# Altium PCB cjb.PcbDoc (part 1 of 2)
Units mil, origin at the board's own origin, x right, y up, seen from the top; angles counter-clockwise.
Board outline 3345 x 2980 mil, 2 copper layers (Top Layer, Bottom Layer), stack 62.8 mil thick; 123 components, 85 nets, 398 pads, 132 vias.
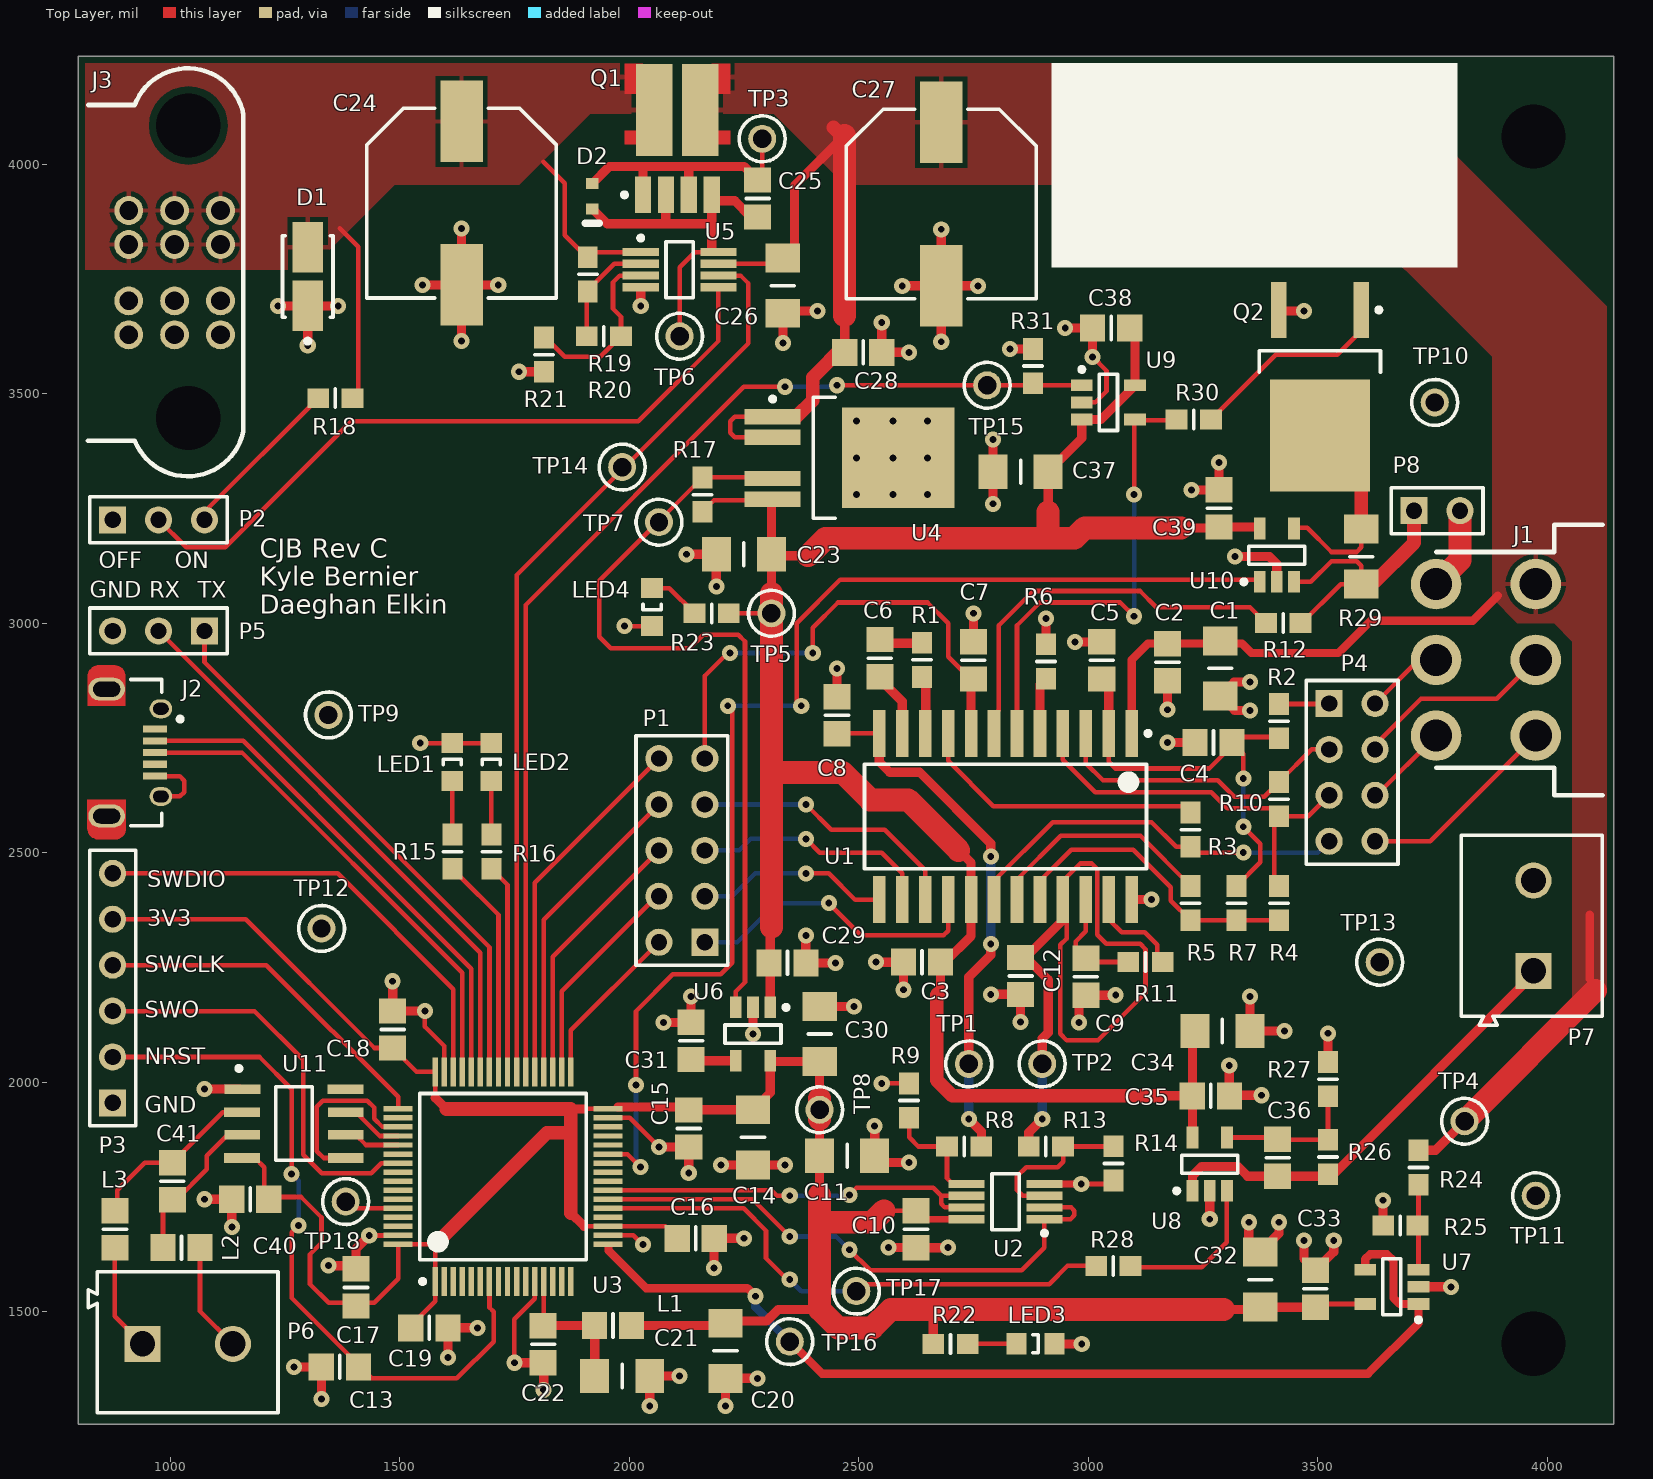
[diagram p0: Top Layer view]
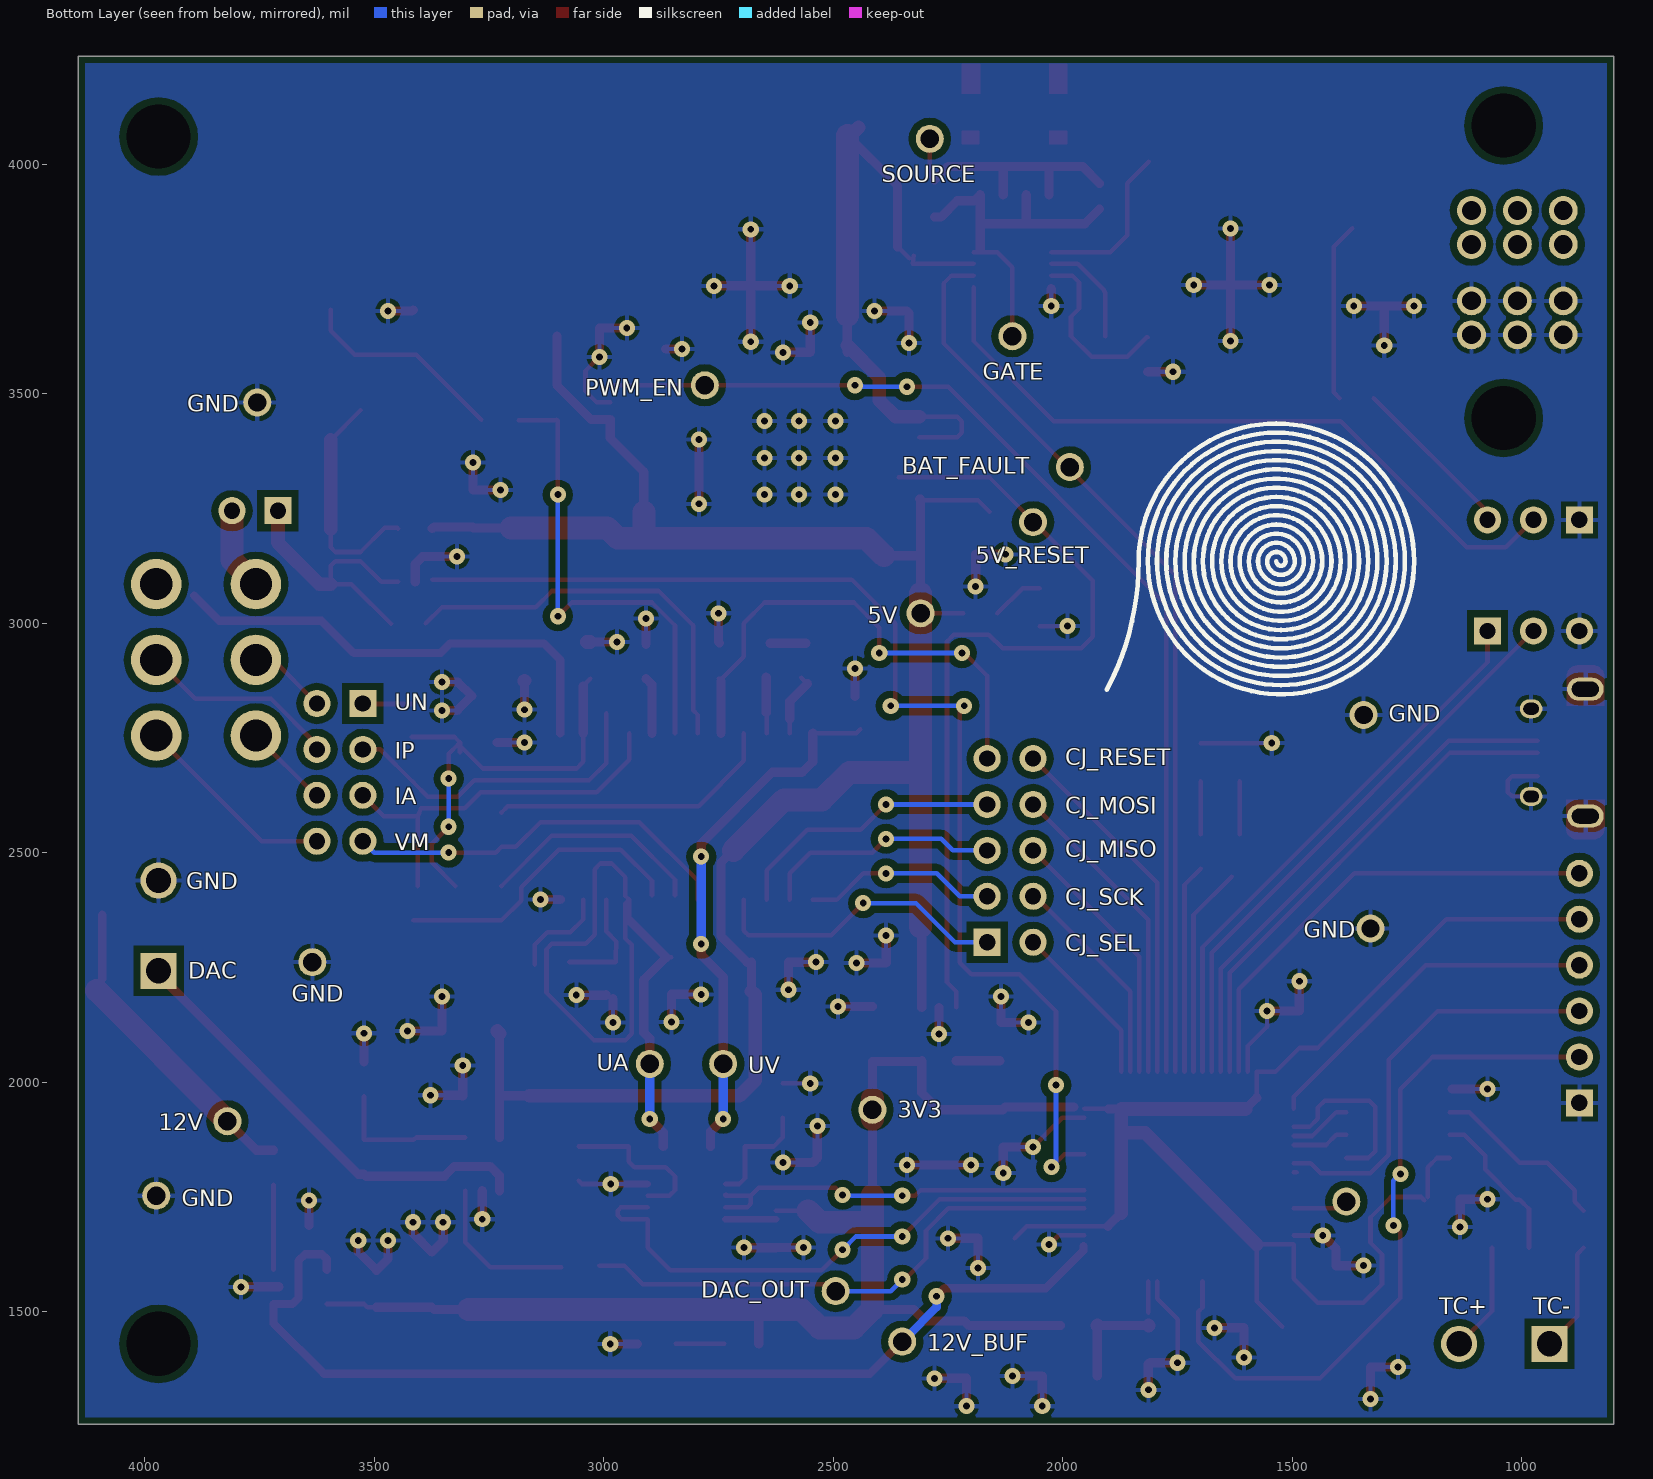
[diagram p1: Bottom Layer view, seen from below]

## Layer stack, top to bottom
Top Solder: solder mask 1, Solder Resist, Dk 3.5
Top Layer: signal copper 1.4
Dielectric 1: core 60, FR4, Dk 4.6
Bottom Layer: signal copper 1.4
Bottom Solder: solder mask 1, Solder Resist, Dk 3.5

## Board outline
800,1255 800,4235 4145,4235 4145,1255

## Design rules (kind name [scope] priority, off if disabled: settings)
BoardOutlineClearance [All] p1: gap=15 ignorepadtopadclearanceinfootprint=FALSE
Clearance [All] p1: gap=10 ignorepadtopadclearanceinfootprint=FALSE except(6: Track-Track Track-SMDPad SMDPad-SMDPad; 15: Track-Fill Track-Poly Track-Region SMDPad-Fill SMDPad-Poly SMDPad-Region THPad-Fill THPad-Poly THPad-Region Via-Fill Via-Poly Via-Region)
DiffPairsRouting [All] p1: maxlimit=10 minlimit=10 mostfreqgap=10 toplayer_minwidth=10 toplayer_maxwidth=15 toplayer_prefwidth=10 bottomlayer_minwidth=10 bottomlayer_maxwidth=15 bottomlayer_prefwidth=10 maxuncoupledlength=500
HoleSize [All] p1: absolutevalues=TRUE maxlimit=200 minlimit=10 maxpercent=80.000 minpercent=20.000
MinimumAnnularRing [All] p1: minimumring=5
MinimumSolderMaskSliver [All] p1: minsoldermaskwidth=4
PlaneConnect [All] p1: planeconnectstyle=Direct reliefexpansion=20 reliefentries=4 reliefconductorwidth=10 reliefairgap=10
PolygonConnect [All] p1: connectstyle=Relief reliefconductorwidth=10 reliefentries=4 polygonreliefangle="90 Angle" airgapwidth=10
RoutingVias [All] p1: holewidth=6 width=16 viastyle="Through Hole" minholewidth=6 minwidth=16 maxholewidth=28 maxwidth=50
SilkToSolderMaskClearance [IsPad] p1: minsilkscreentomaskgap=6 clearancetoexposedcopper=TRUE
SolderMaskExpansion [All] p1: expansion=3
Width [All] p1: maxlimit=100 minlimit=6 preferedwidth=10 minimp=40.000000 maximp=50.000000 favimp=45.000000
25 further rules are at their usual default settings.

## Classes and differential pairs
component class U_thermocouple: C40 C41 L2 L3 U11
component class U_heater: C37 C38 C39 Q2 R29 R30 R31 TP15 U9 U10
component class U_breakout: C34 C35 C36 J1 J2 J3 P3 P4 P5 P6 P7 P8 R26 R27 R28 TP9 TP10 TP11 TP12 TP13 TP17 U8
component class U_power: C23 C24 C25 C26 C27 C28 C29 C30 C31 C32 C33 D1 D2 LED3 LED4 P2 Q1 R17 R18 R19 R20 R21 R22 R23 R24 R25 TP3 TP4 TP5 TP6 TP7 TP8 TP14 TP16 U4 U5 U6 U7
component class U_microcontroller: C13 C14 C15 C16 C17 C18 C19 C20 C21 C22 L1 LED1 LED2 P1 R15 R16 TP18 U3
component class U_cj125: C1 C2 C3 C4 C5 C6 C7 C8 C9 C10 C11 C12 R1 R2 R3 R4 R5 R6 R7 R8 R9 R10 R11 R12 R13 R14 TP1 TP2 U1 U2
differential pair USB_D: +USB_D_P -USB_D_N

## Components (designator, comment, footprint, x,y, rotation, side; value= is the part's Value field where it differs from the comment)
C1 "Generic 1206 Capacitor" 1206 3287.94,2901.5 r270 top value=1u
C2 "Generic 0805 Capacitor" 0805 3172.94,2915.1 r90 top value=33n
C3 "Generic 0805 Capacitor" 0805 2637.94,2261.5 r180 top value=33n
C4 "Generic 0805 Capacitor" 0805 3272.94,2740.1 r180 top value=DNI
C5 "Generic 0805 Capacitor" 0805 3029.65,2918.9 r90 top value=2.2n
C6 "Generic 0805 Capacitor" 0805 2546.27,2923.9 r90 top value=100n
C7 "Generic 0805 Capacitor" 0805 2750,2918.9 r90 top value=1n
C8 "Generic 0805 Capacitor" 0805 2452.94,2799.61 r270 top value=100n
C9 "Generic 0805 Capacitor" 0805 2995,2230 r90 top value=100n
C10 "Generic 0805 Capacitor" 0805 2625,1680 r90 top value=100n
C11 "Generic 1206 Capacitor" 1206 2475,1840 r180 top value=1u
C12 "Generic 0805 Capacitor" 0805 2852.94,2231.5 r90 top value=100n
C13 "Generic 0805 Capacitor" 0805 1370,1380 r0 top value=100n
C14 "Generic 1206 Capacitor" 1206 2270,1880 r90 top value=1u
C15 "Generic 0805 Capacitor" 0805 2130,1899.22 r90 top value=100n
C16 "Generic 0805 Capacitor" 0805 2145,1660 r180 top value=100n
C17 "Generic 0805 Capacitor" 0805 1405,1553 r270 top value=100n
C18 "Generic 0805 Capacitor" 0805 1485,2115 r270 top value=100n
C19 "Generic 0805 Capacitor" 0805 1565,1465 r180 top value=100n
C20 "Generic 1206 Capacitor" 1206 2210,1415 r90 top value=1u
C21 "Generic 1206 Capacitor" 1206 1985,1360 r180 top value=1u
C22 "Generic 0805 Capacitor" 0805 1812.85,1429.25 r90 top value=100n
C23 "Generic 1206 Capacitor" 1206 2250,3150 r180 top value=1u
C24 "Generic Electrolytic Capacitor" NIC-UUX2A470MNL1GS_M 1635,3915 r270 top value=22u
C25 "Generic 0805 Capacitor" 0805 2280,3925 r90 top value=1n
C26 "Generic 1206 Capacitor" 1206 2335,3735 r90 top value=2.2u
C27 "Generic Electrolytic Capacitor" NIC-UUX2A470MNL1GS_M 2680,3912.99 r270 top value=22u
C28 "Generic 0805 Capacitor" 0805 2510,3590 r180 top value=100n
C29 "Generic 0805 Capacitor" 0805 2345,2260 r180 top value=100n
C30 "Generic 1206 Capacitor" 1206 2415,2105 r270 top value=2.2u
C31 "Generic 0805 Capacitor" 0805 2135,2090 r270 top value=10n
C32 "Generic 1206 Capacitor" 1206 3375,1570 r270 top value=1u
C33 "Generic 0805 Capacitor" 0805 3495,1550 r270 top value=100n
C34 "Generic 1206 Capacitor" 1206 3292.4,2111.59 r180 top value=1u
C35 "Generic 0805 Capacitor" 0805 3267.4,1970.37 r180 top value=100n
C36 "Generic 0805 Capacitor" 0805 3412.64,1835.45 r270 top value=DNI
C37 "Generic 1206 Capacitor" 1206 2852.94,3330 r0 top value=1u
C38 "Generic 0805 Capacitor" 0805 3050,3642.99 r0 top value=100n
C39 "Generic 0805 Capacitor" 0805 3285,3250 r270 top value=100n
C40 "Generic 0805 Capacitor" 0805 1175,1745 r0 top value=100n
C41 "Generic 0805 Capacitor" 0805 1005,1784.46 r270 top value=10n
D1 "SMAJ58CA" VISH-DO-214AC-2_M 1300,3755 r90 top
D2 "BZT52C15T-7" DIOD-SOD523-2_V 1920,3930 r270 top
J1 "IPBT-103-H1-XX-D-RA" IPBT-103-H1-XX-D-RA 3866.5,2920 r270 top
J2 "ZX62D-B-5PA8" HIRO-ZX62D-B-5PA8_V 921,2718 r270 top
J3 "MPT-02-01-XX-X-RA-SD" MPT-02-01-XX-X-RA-SD 1010,3762.89 r270 top
L1 "MI0805K601R-10" 0805 1965,1470 r180 top
L2 "MI0805K601R-10" 0805 1025,1639.65 r180 top
L3 "MI0805K601R-10" 0805 880,1680 r90 top
LED1 "150080SS75000" 0805_A 1615,2697.4 r270 top
LED2 "150080SS75000" 0805_A 1700,2697.4 r270 top
LED3 "150080SS75000" 0805_A 2885,1430 r180 top
LED4 "150080SS75000" 0805_A 2050,3035 r90 top
P1 "Header 5X2" HDR2X5 2165,2305 r90 top
P2 "Header 3" HDR1X3 875,3225 r0 top
P3 "Header 6" HDR1X6 875,1955 r90 top
P4 "Header 4X2" HDR2X4 3525,2825 r270 top
P5 "Header 3" HDR1X3 1075,2983.14 r180 top
P6 "SCREW-5.0/5.08 2WAYS" Degson_DG126-5.0-02P-14 940,1430 r0 top
P7 "SCREW-5.0/5.08 2WAYS" Degson_DG126-5.0-02P-14 3970,2242.5 r90 top
P8 "Header 2" HDR1X2 3710,3245 r0 top
Q1 "SQJ974EP-T1_GE3CT-ND" VISH-POWERPAKSO-8_A_V 2105,4078.14 r90 top
Q2 "NTD5865NLT4G" TO-252AA 3505,3515 r270 top
R1 "Generic 0603 Resistor" 0603 2637.94,2920.1 r270 top value="31.6k 1%"
R2 "Generic 0603 Resistor" 0603 3415.62,2786.5 r270 top value=0
R3 "Generic 0603 Resistor" 0603 3222.94,2550.1 r90 top value="301 1%"
R4 "Generic 0603 Resistor" 0603 3415.62,2390.1 r270 top value="470k 5%"
R5 "Generic 0603 Resistor" 0603 3222.94,2390.1 r90 top value="4.7k 5%"
R6 "Generic 0603 Resistor" 0603 2907.94,2916.5 r90 top value="10k 5%"
R7 "Generic 0603 Resistor" 0603 3323.36,2390.1 r270 top value="100k 5%"
R8 "Generic 0603 Resistor" 0603 2730,1860 r180 top value="187k 1%"
R9 "Generic 0603 Resistor" 0603 2610,1960 r270 top value="365k 1%"
R10 "Generic 0603 Resistor" 0603 3415.62,2616.5 r270 top value="61.9 0.1%"
R11 "Generic 0603 Resistor" 0603 3125,2261.5 r180 top value="100k 5%"
R12 "Generic 0603 Resistor" 0603 3425,3000 r180 top value="6.8k 5%"
R13 "Generic 0603 Resistor" 0603 2907.94,1860 r0 top value="187k 1%"
R14 "Generic 0603 Resistor" 0603 3055,1823.14 r90 top value="365k 1%"
R15 "Generic 0603 Resistor" 0603 1615,2502.4 r270 top value="470 5%"
R16 "Generic 0603 Resistor" 0603 1700,2502.4 r270 top value="470 5%"
R17 "Generic 0603 Resistor" 0603 2160,3280 r270 top value="100k 5%"
R18 "Generic 0603 Resistor" 0603 1360,3490 r0 top value="510k 5%"
R19 "Generic 0603 Resistor" 0603 1910,3760 r270 top value="6.34M 1%"
R20 "Generic 0603 Resistor" 0603 1945,3625 r0 top value="95.3k 1%"
R21 "Generic 0603 Resistor" 0603 1815,3585 r270 top value="205k 1%"
R22 "Generic 0603 Resistor" 0603 2700,1430 r180 top value="470 5%"
R23 "Generic 0603 Resistor" 0603 2180,3021.5 r0 top value="470 5%"
R24 "Generic 0603 Resistor" 0603 3719.57,1814.29 r270 top value="768k 1%"
R25 "Generic 0603 Resistor" 0603 3680,1687.8 r0 top value="187k 1%"
R26 "Generic 0603 Resistor" 0603 3522.4,1837.13 r270 top value=187k
R27 "Generic 0603 Resistor" 0603 3522.4,2006.59 r270 top value=365k
R28 "Generic 0603 Resistor" 0603 3055,1600 r0 top value=150k
R29 "Generic 1206 Resistor" 1206 3595,3145 r270 top value="7m 1% 1W"
R30 "Generic 0603 Resistor" 0603 3230,3443.39 r0 top value="4.7k 5%"
R31 "Generic 0603 Resistor" 0603 2880,3560 r270 top value="100k 5%"
TP1 "5001" KSTN-5001 2740,2040 r0 top
TP2 "5001" KSTN-5001 2899.94,2040 r0 top
TP3 "5001" KSTN-5001 2290,4055 r90 top
TP4 "5001" KSTN-5001 3820,1915 r90 top
TP5 "5001" KSTN-5001 2310,3021.5 r0 top
TP6 "5001" KSTN-5001 2110,3625 r90 top
TP7 "5001" KSTN-5001 2065,3220 r90 top
TP8 "5001" KSTN-5001 2415,1940 r0 top
TP9 "5001" KSTN-5001 1345,2800 r0 top
TP10 "5001" KSTN-5001 3755,3480.79 r90 top
TP11 "5001" KSTN-5001 3975,1752.8 r90 top
TP12 "5001" KSTN-5001 1330,2335 r90 top
TP13 "5001" KSTN-5001 3635,2261.5 r90 top
TP14 "5001" KSTN-5001 1985,3340 r90 top
TP15 "5001" KSTN-5001 2780,3518.19 r90 top
TP16 "5001" KSTN-5001 2350,1435 r90 top
TP17 "5001" KSTN-5001 2495,1545 r90 top
TP18 "5001" KSTN-5001 1382.65,1740 r90 top
U1 "CJ125" SOIC-24 2820,2578.9 r270 top
U2 "MCP6L02T-E/MS" MSOP8_M 2820,1740 r180 top
U3 "STM32L475RCT3" STM-LQFP64_L 1725.36,1794.3 r90 top
U4 "TLS850D0TEV50ATMA1" KVU0005A_M 2480,3360 r0 top
U5 "LTC4367HMS" MSOP8_M 2110,3770 r0 top
U6 "TPS79933QDDCRQ1" DDC0005A_M 2270,2105 r270 top
U7 "MCP6L01T-E/OT" DDC0005A_M 3661.5,1554.32 r180 top
U8 "MCP6L01T-E/OT" DDC0005A_M 3264.8,1821.59 r90 top
U9 "UCC27519DBVT" DDC0005A_M 3044.14,3480.79 r0 top
U10 "INA180A2IDBVT" DDC0005A_M 3411,3148 r90 top
U11 "MAX31855KASA+" SOIC8 1270,1910 r0 top

## Footprints (in the part's own frame and the unit in brackets; to place one, negate y for a bottom-side part, rotate by r counter-clockwise, add the part's x,y. Pads: shape width x height; smd on the part's side, far side on the other; paste and mask are expansions set on the pad)
0603 [mm] "0603 - Based on VIshey Recommendations"
  rect 1.2x1.1 smd mask+0.1: 1(-0.95,0) 2(0.95,0)
  silkscreen extent 0,-0.51 0,0.51, body extent -0.8,-0.4 0.8,0.4, height 0.76
0805 [mm] "0805 - Based on VIshey Recommendations"
  rect 1.4x1.5 smd mask+0.1: 1(-1.025,0) 2(1.025,0)
  silkscreen extent 0,-0.64 0,0.64, body extent -1,-0.63 1,0.63, height 1.02
0805_A [mm] "Chip LED, 2-Leads, Body 2.0x1.3mm, IPC Medium Density"
  rect 1.1x1.2 smd: 1(-1.05,0) 2(1.05,0)
  silkscreen extent -0.15,-0.5 0.15,0.5, body extent -1,-0.62 1,0.63, height 0.68
1206 [mm] "1206 - Based on VIshey Recommendations"
  rect 1.6x1.9 smd mask+0.1: 1(-1.524,0) 2(1.524,0)
  silkscreen extent 0,-0.64 0,0.64, body extent -1.6,-0.79 1.6,0.79, height 1.6
DDC0005A_M [mm] "SOT23, 5-Leads, Body 3.05x1.75mm, Pitch 0.95mm, IPC Low Density"
  rect 1.2x0.65 smd mask+0.076: 1(-1.475,0.95) 2(-1.475,0) 3(-1.475,-0.95) 4(1.475,-0.95) 5(1.475,0.95)
  silkscreen extent -1.6,-1.55 0.5,1.95, body extent -1.5,-1.52 1.5,1.52, height 1.45
Degson_DG126-5.0-02P-14 [mm]
  rect 2x2 hole 1.4 mask+0.102: 1(0,0)
  round 2 hole 1.4 mask+0.102: 2(5,0)
  silkscreen extent -3,-3.8 7.5,4
DIOD-SOD523-2_V [mm] "SOD523, 2-Leads, Body 1.2x0.8mm"
  rect 0.6x0.7 smd: 1(-0.7,0) 2(0.7,0)
  silkscreen extent 1.5,-0.4 1.5,0.4, body extent -0.8,-0.4 0.8,0.4, height 0.65
HDR1X2 [mm] "Connector; Header; 2 Position"
  rect 1.5x1.5 hole 0.9: 1(0,0)
  round 1.5 hole 0.9: 2(2.54,0)
  silkscreen extent -1.27,-1.27 3.81,1.27
HDR1X3 [mm] "Connector; Header; 3 Position"
  rect 1.5x1.5 hole 0.9: 1(0,0)
  round 1.5 hole 0.9: 2(2.54,0) 3(5.08,0)
  silkscreen extent -1.27,-1.27 6.35,1.27
HDR1X6 [mm] "Connector; Header; 6 Position"
  rect 1.5x1.5 hole 0.9: 1(0,0)
  round 1.5 hole 0.9: 2(2.54,0) 3(5.08,0) 4(7.62,0) 5(10.16,0) 6(12.7,0)
  silkscreen extent -1.27,-1.27 13.97,1.27
HDR2X4 [mm] "Connector; Header; 4x2 Position"
  rect 1.5x1.5 hole 0.9: 1(0,0)
  round 1.5 hole 0.9: 2(0,2.54) 3(2.54,0) 4(2.54,2.54) 5(5.08,0) 6(5.08,2.54) 7(7.62,0) 8(7.62,2.54)
  silkscreen extent -1.27,-1.27 8.89,3.81
HDR2X5 [mm] "Connector; Header; 5x2 Position"
  rect 1.5x1.5 hole 0.9: 1(0,0)
  round 1.5 hole 0.9: 2(0,2.54) 3(2.54,0) 4(2.54,2.54) 5(5.08,0) 6(5.08,2.54) 7(7.62,0) 8(7.62,2.54) 9(10.16,0) 10(10.16,2.54)
  silkscreen extent -1.27,-1.27 11.43,3.81
HIRO-ZX62D-B-5PA8_V [mm] "SMD, 5-Leads, Body 7.5x5mm, Pitch 0.65mm"
  rect 0.4x1.35 smd mask+0.051: 1(-1.3,1.175) 2(-0.65,1.175) 3(0,1.175) 4(0.65,1.175) 5(1.3,1.175)
  oval 1.05x1.25 hole 0.65 slot 0.85 at 90 deg mask+0.076: 6(-2.425,1.5) 7(2.425,1.5)
  oval 1.27x2.032 hole 0.825 slot 1.5 at 90 deg: 8(-3.512,-1.5) 9(3.512,-1.5)
  Top Layer region: 4.2,-2.45 4.391,-2.412 4.554,-2.304 4.662,-2.141 4.7,-1.95 4.7,-1.95 4.7,-1.05 4.662,-0.859 4.554,-0.696 4.391,-0.588 4.2,-0.55 4.2,-0.55 2.6,-0.55 2.6,-2.45
  Top Layer region: -4.2,-2.45 -4.391,-2.412 -4.554,-2.304 -4.662,-2.141 -4.7,-1.95 -4.7,-1.95 -4.7,-1.05 -4.662,-0.859 -4.554,-0.696 -4.391,-0.588 -4.2,-0.55 -4.2,-0.55 -2.6,-0.55 -2.6,-2.45
  Top Layer region: -4.2,-2.54 -4.492,-2.478 -4.718,-2.285 -4.826,-2.007 -4.826,-2.007 -4.826,-1.016 -4.724,-0.729 -4.497,-0.526 -4.2,-0.457 -4.2,-0.457 -2.6,-0.457 -2.6,-2.54
  Top Layer region: 4.2,-2.565 4.487,-2.489 4.704,-2.287 4.801,-2.007 4.801,-2.007 4.801,-0.991 4.706,-0.709 4.488,-0.506 4.2,-0.432 4.2,-0.432 2.6,-0.432 2.6,-2.565
  silkscreen extent -4.05,-0.15 4.05,2.69, body extent -4.05,-4.25 4.05,1.55, height 2.75
IPBT-103-H1-XX-D-RA [mil]
  round 110 hole 70 mask+3: 1(-165,108.5) 2(0,108.5) 3(165,108.5) 4(-165,-108.5) 5(0,-108.5) 6(165,-108.5)
  silkscreen extent -294,-109 295,254, body extent -274,-131 274,574, height 439
KSTN-5001 [mm] "Test Point, Through Hole, Dia 2.54mm"
  round 1.55 hole 1.016: 1(0,0)
  silkscreen extent -1.27,-1.27 1.27,1.27, body extent -1.24,-1.24 1.25,1.25, height 4.62
KVU0005A_M [mm] "DPAK, 5-Leads, Body 6.22x6.7mm, Pitch 1.14mm, IPC Low Density"
  rect 3.1x0.85 smd mask+0.076: 1(-4.25,2.28) 2(-4.25,1.14) 4(-4.25,-1.14) 5(-4.25,-2.28)
  rect 6.2x5.55 smd mask+0.076: 6(2.7,0)
  silkscreen extent -4.37,-3.35 -0.8,3.38, body extent -4.77,-3.25 5.13,3.25, height 2.32
MPT-02-01-XX-X-RA-SD [mm]
  round 1.6 hole 1.04 mask+0.075: 1(-3.458,2.54) 2(-3.458,0) 3(-3.458,-2.54) 4(-1.578,2.54) 5(-1.578,0) 6(-1.578,-2.54) 7(1.542,2.54) 8(1.542,0) 9(1.542,-2.54) 10(3.423,2.54) 11(3.423,0) 12(3.423,-2.54)
  round 0 hole 3.56 unplated: 25(-8.157,0.76) 26(8.026,0.76)
  silkscreen extent -11.32,-4.79 11.25,3.8, body extent -10.73,-11.49 10.63,3.32, height 10.93
MSOP8_M [mm] "TSOP, 8-Leads, Body 3x3mm, Pitch 0.65mm, IPC Low Density"
  rect 2x0.45 smd mask+0.046: 1(-2.15,0.975) 2(-2.15,0.325) 3(-2.15,-0.325) 4(-2.15,-0.975) 5(2.15,-0.975) 6(2.15,-0.325) 7(2.15,0.325) 8(2.15,0.975)
  silkscreen extent -2.27,-1.55 0.75,1.87, body extent -1.55,-1.55 1.55,1.55, height 1.1
NIC-UUX2A470MNL1GS_M [mm] "Aluminum Electrolytic Capacitor, Body 10.5x10.5mm, IPC Low Density"
  rect 4.5x2.35 smd mask+0.076: 1(-4.525,0) 2(4.525,0)
  silkscreen extent -5.25,-5.25 5.25,5.25, body extent -5.65,-5.25 5.65,5.25, height 10.8
SOIC8 [mm] "Based on MAX31855"
  rect 1.98x0.53 smd mask+0.046: 1(-2.845,1.905) 2(-2.87,0.635) 3(-2.861,-0.625) 4(-2.87,-1.905) 5(2.87,-1.905) 6(2.861,-0.625) 7(2.87,0.635) 8(2.845,1.905)
  silkscreen extent -3.17,-2.03 1.02,3.17, body extent -3.01,-2.45 3.01,2.45, height 1.63
SOIC-24 [mm] "SOIC, 24-Leads, Body 15.4x7.5mm, Pitch 1.27mm, IPC Low Density"
  rect 2.6x0.7 smd mask+0.076: 1(-4.6,6.985) 2(-4.6,5.715) 3(-4.6,4.445) 4(-4.6,3.175) 5(-4.6,1.905) 6(-4.6,0.635) 7(-4.6,-0.635) 8(-4.6,-1.905) 9(-4.6,-3.175) 10(-4.6,-4.445) 11(-4.6,-5.715) 12(-4.6,-6.985) 13(4.6,-6.985) 14(4.6,-5.715) 15(4.6,-4.445) 16(4.6,-3.175) 17(4.6,-1.905) 18(4.6,-0.635) 19(4.6,0.635) 20(4.6,1.905) 21(4.6,3.175) 22(4.6,4.445) 23(4.6,5.715) 24(4.6,6.985)
  silkscreen extent -4.72,-7.8 2.9,8.01, body extent -5.26,-7.72 5.26,7.72, height 1.7
STM-LQFP64_L [mm] "QFP, 64-Leads, Body 10x10mm, Pitch 0.5mm, IPC High Density"
  rect 1.6x0.3 smd mask+0.038: 1(-5.8,3.75) 2(-5.8,3.25) 3(-5.8,2.75) 4(-5.8,2.25) 5(-5.8,1.75) 6(-5.8,1.25) 7(-5.8,0.75) 8(-5.8,0.25) 9(-5.8,-0.25) 10(-5.8,-0.75) 11(-5.8,-1.25) 12(-5.8,-1.75) 13(-5.8,-2.25) 14(-5.8,-2.75) 15(-5.8,-3.25) 16(-5.8,-3.75) 33(5.8,-3.75) 34(5.8,-3.25) 35(5.8,-2.75) 36(5.8,-2.25) 37(5.8,-1.75) 38(5.8,-1.25) 39(5.8,-0.75) 40(5.8,-0.25) 41(5.8,0.25) 42(5.8,0.75) 43(5.8,1.25) 44(5.8,1.75) 45(5.8,2.25) 46(5.8,2.75) 47(5.8,3.25) 48(5.8,3.75)
  rect 0.3x1.6 smd mask+0.038: 17(-3.75,-5.8) 18(-3.25,-5.8) 19(-2.75,-5.8) 20(-2.25,-5.8) 21(-1.75,-5.8) 22(-1.25,-5.8) 23(-0.75,-5.8) 24(-0.25,-5.8) 25(0.25,-5.8) 26(0.75,-5.8) 27(1.25,-5.8) 28(1.75,-5.8) 29(2.25,-5.8) 30(2.75,-5.8) 31(3.25,-5.8) 32(3.75,-5.8) 49(3.75,5.8) 50(3.25,5.8) 51(2.75,5.8) 52(2.25,5.8) 53(1.75,5.8) 54(1.25,5.8) 55(0.75,5.8) 56(0.25,5.8) 57(-0.25,5.8) 58(-0.75,5.8) 59(-1.25,5.8) 60(-1.75,5.8) 61(-2.25,5.8) 62(-2.75,5.8) 63(-3.25,5.8) 64(-3.75,5.8)
  silkscreen extent -5.92,-4.6 4.6,4.6, body extent -6,-6 6,6, height 1.6
TO-252AA [mm] "TO-252AA based on IRLR2908"
  rect 3.1x0.85 smd mask+0.076: 1(-4.25,2.28) 3(-4.25,-2.28)
  rect 6.2x5.55 smd mask+0.076: 4(2.7,0)
  silkscreen extent -4.37,-3.35 -0.8,3.38, body extent -4.77,-3.25 5.13,3.25, height 2.32
VISH-DO-214AC-2_M [mm] "DO-214AC, 2-Leads, Body 4.5x2.79mm, IPC Low Density"
  rect 2.8x1.7 smd mask+0.076: 1(-1.625,0) 2(1.625,0)
  silkscreen extent -3.7,-1.4 2.25,1.4, body extent -2.25,-1.39 2.25,1.4, height 2.29
VISH-POWERPAKSO-8_A_V [mil] "SMD, 8-Leads, Body 6.15x5.155mm, Pitch 1.27mm"
  rect 80x35 smd mask+3: 1(-145,75) 2(-145,25) 3(-145,-25) 4(-145,-75)
  rect 200x80 smd mask+3: 5(40,-50) 6(40,50)
  Top Layer region: -35,-115 -5,-115 -5,-77.5 -35,-77.5
  Top Layer region: -35,75 -5,75 -5,115 -35,115
  Top Layer region: 75,75 140,75 140,115 75,115
  Top Layer region: 75,-115 140,-115 140,-75 75,-75
  silkscreen extent -150,110 -140,120, body extent -141,-100 101,101, height 46

## Part data
C1 C11 C14 C20 C21 C23 C26 C30 C32 C34 C37: library part C_1206
C2 C3 C4 C5 C6 C7 C8 C9 C10 C12 C13 C15 C16 C17 C18 C19 C22 C25 C28 C29 C31 C33 C35 C36 C38 C39 C40 C41: library part C_0805
C24 C27: library part C_can, "Generic PCAP_10x10 Can Aluminum Electrolytic Capacitor", Voltage=200V
D1: "Transient Voltage Suppressor, 6.40 to 231 V, 58 V Stand-off Voltage, Bi-Directional, -55 to 155 degC, 2-pin DO-214AC, Pb-Free, Tape and Reel", Manufacturer="Vishay Semiconductor", Operating Junction and Storage Temperature Range="-55 to 150 degC", PartNumber=SMAJ58CA-E3/5A, Supplier Part Number 1=SMAJ58CALFCT-ND, ComponentLink1Description="Manufacturer URL", ComponentLink1URL=http://www.vishay.com/, ComponentLink2Description=Datasheet, ComponentLink2URL=http://www.vishay.com/docs/88390/smaj50a.pdf, ComponentLink3Description="Package Specification", ComponentLink3URL=http://www.vishay.com/docs/88390/smaj50a.pdf, DatasheetVersion=12/8/2013, ID (uA)=2, IFSM="40 A", Mounting Technology="Surface Mount", PackageDescription="2-Pin DO-214AC (SMA), Body 4.245 x 2.665 mm", PackageReference=DO-214AC-2, Packing="Tape and Reel", PPPM (W)="400, 300", RoHS=TRUE, Supplier 1=Digi-Key, VBR Bi-Directional (V)="6.4 to 231", VWM (V)=58
D2: library part BZT52C15T, "Zener Diode 15V 300mW ±6% Surface Mount SOD-523", Manufacturer="Diodes Inc", Maximum Reverse Current="0.1 uA", Operating Temperature="-65 to 150 degC", PartNumber=BZT52C16-7-F, Power Max="500 mW", Voltage Zener="16 V Typ.", ComponentLink1Description="Manufacturer URL", ComponentLink1URL=http://www.diodes.com/, ComponentLink2Description=Datasheet, ComponentLink2URL=http://www.diodes.com/datasheets/ds18004.pdf, ComponentLink3Description="Package Specification", ComponentLink3URL=http://www.diodes.com/datasheets/ap02002.pdf, DatasheetVersion="Rev. 37-2", Maximum Zener Impedance f="1 kHz ZZK=200 Ohm", Mounting Technology="Surface Mount", PackageDescription="2-Pin SOD123, Body 2.7 x 1.55 mm, Height 1.45 mm", PackageReference=SOD123, PackageVersion="Rev. 79", Packing="Tape and Reel", RoHS=TRUE, Tol V="5.56% Typ."
J1: "0.165 INCH DOUBLE ROW TERMINAL ASSEMBLY", ComponentLink1Description="Manufacturer URL", ComponentLink1URL=http://www.linear.com/, ComponentLink2Description=Datasheet, ComponentLink2URL=http://cds.linear.com/docs/en/datasheet/4356fa.pdf, ComponentLink3Description="Package Specification", ComponentLink3URL=http://cds.linear.com/docs/en/packaging/05081661_F_MS.pdf
J2: library part Micro_USB, "Micro-USB Connector Meeting USB 2.0 Standard, -30 to 85 degC, 5-Pin SMD, RoHS, Tape and Reel", Color=Black, Current Rating=1A, Manufacturer=HiroseElectric, Operating Temperature Range=-30Cto+85C, Package Description="5-Pin Surface Mount Device, Body 7.5 x 5 mm, Pitch 0.65 mm", Voltage Rating=30V, Brand=HiroseConnector, Connector Type=Receptacle, Contact Material=CopperAlloy, Contact Plating=Gold, Datasheet URL=https://datasheet.ciiva.com/22825/0900766b8118f7b1-22825836.pdf, Datasheet Version=08/2010, Factory Pack Quantity=2000, Gender=Male, Manufacturer URL=https://www.hirose.com, Mounting Angle=Right, Mounting Technology=SurfaceMount, Number of Contacts=5Contact, Number of Ports=1Port, Package Reference=ZX62D-B-5PA8, Packaging=Reel, Product=MicroUSBTypeBConnectors, Product Category=USBConnectors, RoHS=Details, Series=ZX, Shell Plating=Tin, Standard=USB2.0, Termination Style=Solder
L1 L2 L3: library part MI0805K, "Chip Bead for Power Filtering, 1500 mA, 600 Ohm, -40 to 125 degC, 0805 (2012 Metric), RoHS, Tape and Reel", Current Rating (Max)=1.5A, DC Resistance (DCR) (Max)=100mOhm, Impedance @ Frequency=600Ohm@100MHz, Manufacturer=Laird, Operating Temperature=-40degC~125degC, Package / Case=0805(2012Metric), Package Description="2-Pin Surface Mount Device, Body 2 x 1.25 mm", Package Reference=MI0805K601R-10-2, Ratings=-, Standard Package=1, Catalog Drawings=(HI,HZ,LI,MI)0805Series_1.10mmMax.Height, Category=Filters, Datasheet URL=https://datasheet.ciiva.com/3082/mi0805k601r-10-a-vp-3082219.pdf, Datasheet Version="Rev. A, 01/2004", Family=FerriteBeadsandChips, Filter Type=PowerLine, Height (Max)="0.043\"(1.10mm)", Kits=240-2227-ND-KITEMIFERRITEBEADCHIPSMD, Manufacturer URL=https://www.lairdtech.com, Mounting Type=SurfaceMount, Number of Lines=1, Online Catalog=MISeries, Other Names=240-2390-1, Packaging=CutTape(CT), Series=MI, Size / Dimension="0.079\"Lx0.049\"W(2.00mmx1.25mm)"
LED1 LED2 LED3 LED4: library part LED_0805, "SMD mono-color Chip LED, WL-SMCW, Super Red", Color="Super Red", Manufacturer="Wuerth Elektronik", ComponentLink1Description="Manufacturer URL", ComponentLink1URL=http://www.we-online.com, ComponentLink2Description=Datasheet, ComponentLink2URL=http://katalog.we-online.com/led/datasheet/150080SS75000.pdf, PackageReference=0805_A, PartNumber=150080SS75000
P1: "Header, 5-Pin, Dual row", LatestRevisionDate=17-Jul-2002, LatestRevisionNote="Re-released for DXP Platform.", Publisher="Altium Limited"
P2 P5: "Header, 3-Pin", LatestRevisionDate=17-Jul-2002, LatestRevisionNote="Re-released for DXP Platform.", Publisher="Altium Limited"
P3: "Header, 6-Pin", LatestRevisionDate=17-Jul-2002, LatestRevisionNote="Re-released for DXP Platform.", Publisher="Altium Limited"
P4: "Header, 4-Pin, Dual row", LatestRevisionDate=17-Jul-2002, LatestRevisionNote="Re-released for DXP Platform.", Publisher="Altium Limited"
P6 P7: library part Screw_Header_2, "Socket, Screw Terminal Block, 2 Way, 5.0 mm Pitch, 90 Degree Angle, Through-Hole", Contact Resistance="20 mOhm", Insulation Resistance="5000 MOhm / 1000 V", Manufacturer="No Vendor", Rated Current="25 A", Rated Voltage="300 V", Temperature Range="-40 to 105 degC", ComponentLink1Description=Datasheet, ComponentLink1URL="5mm screw terminal in SVN", Mounting Technology="Through Hole", PackageDescription="Socket, Screw Terminal Block, 2 Way, Pitch 5 mm, 90 Degree Angle, Through-Hole", PartNumber="SCREW-5.0/5.08 2WAYS", Poles=2
P8: "Header, 2-Pin", LatestRevisionDate=17-Jul-2002, LatestRevisionNote="Re-released for DXP Platform.", Publisher="Altium Limited"
Q1: library part SQJ974EP, "Mosfet Array 2 N-Channel (Dual) 100V 30A (Tc) 48W Surface Mount PowerPAK® SO-8 Dual", Current - Continuous Drain (Id) @ 25°C=20A, Drain to Source Voltage (Vdss)=40V, Input Capacitance (Ciss) @ Vds=565pF@20V, Manufacturer=Vishay, Package / Case=PowerPAK®SO-8Dual, Package Description="8-Pin Surface Mount Device, Body 6.15 x 5.155 mm, Pitch 1.27 mm", Package Reference=POWERPAKSO-8, Power - Max=15.6W, Standard Package=1, Category=DiscreteSemiconductorProducts, Datasheet URL=http://www.vishay.com/docs/65366/si7288dp.pdf, Datasheet Version="Rev. A, 10/2009", Family=FETs-Arrays, FET Feature=Standard, FET Type=2N-Channel(Dual), Gate Charge (Qg) @ Vgs=15nC@10V, Manufacturer URL=http://www.vishay.com/, Mounting Technology=SurfaceMount, Mounting Type=SurfaceMount, Online Catalog=N-ChannelStandardFETs, Other Names=SI7288DP-T1-GE3DKR, Packaging=Digi-Reel®, PCN Assembly/Origin=MultipleFabracationChanges09/Jul/2014, Rds On (Max) @ Id, Vgs=19mOhm@10A,10V, Series=TrenchFET®, Supplier Device Package=PowerPAK®SO-8Dual, Vgs(th) (Max) @ Id=2.8V@250µA
Q2: library part NTD5865NL, "N-Channel 60V 46A (Tc) 71W (Tc) Surface Mount DPAK"
R1 R2 R3 R4 R5 R6 R7 R8 R9 R10 R11 R12 R13 R14 R15 R16 R17 R18 R19 R20 R21 R22 R23 R24 R25 R26 R27 R28 R30 R31: library part R_0603
R29: library part R_1206
TP1 TP2 TP3 TP4 TP5 TP6 TP7 TP8 TP9 TP10 TP11 TP12 TP13 TP14 TP15 TP16 TP17 TP18: library part TP5001, "Test Point, Black, 1-Pin THD, RoHS, Bulk", Alternate Color="5004K-ND / -TESTPOINTPCMINI.040\"DYELLOW / 5003K-ND / -TESTPOINTPCMINI.040\"DORANGE / 5002K-ND / -TESTPOINTPCMINI.040\"DWHITE / 5000K-ND / -TESTPOINTPCMINI.040\"DRED", Color=Black, Manufacturer=Keystone, Standard Package=100, Catalog Drawings=5000Series, Category=TestandMeasurement, Datasheet URL=https://ciiva.com/datasheet-click-2917627?src=ciiva&sig=bd195616, Datasheet Version="Rev. G, 12/2008", Family=TestPoints, Kits="DKTGRS232C-KIT-ND / -TTLCONVERTER", Manufacturer URL=http://www.keyelco.com/, Material=Base,Nylon46,UL94V-0, Mounting Type="0.040\"(1.02mm)HoleDiameter", Online Catalog=ColorCodedTestPoints, Other Names=5001K, Packaging=Bulk, RoHS Information=RoHSComplianceStatement, Series=THM, Terminal="0.010\"x0.020\"(0.25mmx0.51mm)PhosphorBronzeWire,SilverPlated", Type=PCTestPoint,Miniature
U1: "5V 2Mbaud SMT Lambda Probe Interface IC - SOIC-24", Package Reference=SOIC-24, Supplier Part Number 1=0272240104, Supplier 1="Future Electronics"
U2: library part MCP6L02, "1 MHz, 85 μA Dual Op Amp, 8-Pin MSOP, Extended Temperature Range, Tape and Reel", ComponentLink1Description="Manufacturer URL", ComponentLink1URL=http://www.microchip.com/, ComponentLink2Description=Datasheet, ComponentLink2URL=http://ww1.microchip.com/downloads/en/DeviceDoc/22140b.pdf, ComponentLink3Description="Package Specification", ComponentLink3URL=http://www.microchip.com/stellent/groups/techpub_sg/documents/packagingspec/en012702.pdf, DatasheetVersion="revB, Sep-2011", PackageDescription="8-Lead Plastic Micro Small Outline Package (MS) [MSOP]", PackageReference=MSOP-MS8, PackageVersion="revBB, Aug-2009", RevisionNote="URLs added. DatasheetVersion updated."
U3: "Ultra-Low-Power ARM Cortex-M4 32-bit MCU+FPU, 256 KB Flash, 128 KB Internal RAM, 51 I/Os, 64-Pin LQFP, -40 to 125 degC, Tray", I/Os (High Current)=51, Operating Frequency(F) (Processor speed) (MHz)=80, Package=LQFP64, Package Description="64-Pin Low-profile Quad Flat Package, Body 10 x 10 mm, Pitch 0.5 mm", Supplier Part Number 1=497-16840-ND, Supply Voltage(Vcc) min (V)=1.71, ComponentLink1Description=Datasheet, ComponentLink1URL=http://www.st.com/content/ccc/resource/technical/document/datasheet/90/51/73/d2/53/60/4f/5f/DM00172872.pdf/files/DM00172872.pdf/jcr:content/translations/en.DM00172872.pdf, Core="ARM Cortex-M4", D/A Converter=2, DatasheetVersion="Rev. 4", FLASH Size (Prog) (kB)=256, Internal RAM Size (kB)=128, Mounting Technology="Surface Mount", Packing=Tray, Supplier 1=Digi-Key
U4: library part TLS850D0TE, "Linear Voltage Regulator IC  1 Output  500mA PG-TO252-5", Manufacturer="Texas Instruments", PartNumber=TPS7A6150QKVURQ1, Supplier Part Number 1=296-36856-6-ND, Accuracy(%)=2, Code_JEDEC=TO-252, ComponentLink1Description="Manufacturer URL", ComponentLink1URL=http://www.ti.com/, ComponentLink2Description=Datasheet, ComponentLink2URL=http://www.ti.com/general/docs/lit/getliterature.tsp?genericPartNumber=TPS7A6150-Q1&fileType=pdf, ComponentLink3Description="Package Specification", ComponentLink3URL=http://www.ti.com/lit/ml/mpsf019/mpsf019.pdf, DatasheetVersion=SLVSA62G, Eco-Plan="Green (RoHS & no Sb/Br)", Fixed Output Options(V)=5, Iout(Max)(A)=0.3, Iq(Typ)(mA)=0.02, Mounting Technology="Surface Mount", PackageDescription="5-Pin Plastic Flange Mount, Body 6.1 x 6.6 mm, Pitch 1.14 mm", PackageReference=KVU0005A, PackageVersion=4205521-3/D, SubFamily="Single Channel LDO", Supplier 1=Digi-Key, Vdo(Typ)(mV)=300, Vin(Max)(V)=40, Vin(Min)(V)=4, Vout Adj(Max)(V)=5, Vout Adj(Min)(V)=5
U5: library part LTC4367, "100V Overvoltage, Undervoltage and Reverse Supply Protection Controller", ComponentLink1Description="Manufacturer URL", ComponentLink1URL=http://www.linear.com/, ComponentLink2Description=Datasheet, ComponentLink2URL=http://cds.linear.com/docs/en/datasheet/4356fa.pdf, ComponentLink3Description="Package Specification", ComponentLink3URL=http://cds.linear.com/docs/en/packaging/05081661_F_MS.pdf
U6: library part TPS79933, "Single Output High PSRR LDO, 200 mA, Fixed 3.3 V Output, 2.7 to 6.5 V Input, with Low IQ, 5-pin SOT (DDC), -40 to 125 degC, Green (RoHS & no Sb/Br)", Manufacturer="Texas Instruments", Rating=Automotive, Accuracy(%)=2, Code_JEDEC=MO-193, ComponentLink1Description="Manufacturer URL", ComponentLink1URL=http://www.ti.com/, ComponentLink2Description=Datasheet, ComponentLink2URL=http://www.ti.com/general/docs/lit/getliterature.tsp?genericPartNumber=TPS79933-Q1&fileType=pdf, ComponentLink3Description="Package Specification", ComponentLink3URL=http://www.ti.com/litv/pdf/mpds123d, ComponentLink4Description="URL Link1", ComponentLink4URL="Samples URL:http://www.ti.com/product/tps79933-q1#samples", DatasheetVersion=SBVS097E, Eco-Plan="Green (RoHS & no Sb/Br)", Fixed Output Options(V)=3.3, Iout(Max)(A)=0.2, Iq(Typ)(mA)=0.04, Mounting Technology="Surface Mount", PackageDescription="5-Pin Plastic Small Outline, Body 2.9 x 1.6 mm, 0.95 mm Pitch", PackageReference=DDC0005A, PackageVersion=4204403-2/E, PartNumber=TPS79933QDDCRQ1, SubFamily="Single Channel LDO", Vdo(Typ)(mV)=90, Vin(Max)(V)=6.5, Vin(Min)(V)=2.7, Vout Adj(Max)(V)=3.3, Vout Adj(Min)(V)=3.3
U7 U8: library part MCP6L01, "1 MHz, 85 uA Op Amp, 5-Pin SOT-23, Extended Temperature Range", Code_IPC=SOT23-5, ComponentLink1Description="Manufacturer URL", ComponentLink1URL=http://www.microchip.com/, ComponentLink2Description=Datasheet, ComponentLink2URL=http://ww1.microchip.com/downloads/en/DeviceDoc/22140b.pdf, ComponentLink3Description="Package Specification", ComponentLink3URL=http://www.microchip.com/stellent/groups/techpub_sg/documents/packagingspec/en012702.pdf, DatasheetVersion="revB, Sep-2011", PackageDescription="5-Lead Plastic Small Outline Transistor (OT) [SOT-23]", PackageReference=SOT-23-OT5, PackageVersion="revBB, Aug-2009", RevisionNote="URLs added. DatasheetVersion updated."
U9: library part UCC27519, "Low-Side Gate Driver IC Non-Inverting SOT-23-5"
U10: library part INA180A2, "Current Sense Amplifier 1 Circuit Rail-to-Rail SOT-23-5"
U11: library part MAX31855, "Cold-Junction Compensated / Thermocouple-to-Digital Converter", ComponentLink1Description="Manufacturer URL", ComponentLink1URL=http://www.linear.com/, ComponentLink2Description=Datasheet, ComponentLink2URL=http://cds.linear.com/docs/en/datasheet/4356fa.pdf, ComponentLink3Description="Package Specification", ComponentLink3URL=http://cds.linear.com/docs/en/packaging/05081661_F_MS.pdf
J3: ComponentLink1Description="Manufacturer URL", ComponentLink1URL=http://www.linear.com/, ComponentLink2Description=Datasheet, ComponentLink2URL=http://cds.linear.com/docs/en/datasheet/4356fa.pdf, ComponentLink3Description="Package Specification", ComponentLink3URL=http://cds.linear.com/docs/en/packaging/05081661_F_MS.pdf

## Free pads (board coordinates)
  round 0 hole 140.16 unplated: ""(3970,1430) ""(3970,4060)

## Via types
v1: diameter 35, hole 15, Top Layer to Bottom Layer, tented both sides, 112 vias
v2: diameter 35, hole 15, Top Layer to Bottom Layer, 20 vias

## Nets (pads, with @x,y where several pads share a name; then routed paths per layer and width w, separated by ;. In a path a pad name is that pad's centre, name@x,y a point inside that pad or via, vN(x,y) a via of type N, cw(c..) or ccw(c..) an arc to the next point about the centre after c; other vN are vias at no path point)
3V3: C10.2 C11.2 C14.2 C15.2 C16.2 C17.2 C18.2 C19.2 C20.2 C30.2 C32.2 C33.2 C40.2 L1.1 P3.5 R22.2 TP8.1 U2.8 U3.1 U3.19 U3.32 U3.48 U3.64 U6.5 U7.5 U11.4 | length 6392.3
  Top Layer w10: P3.5 1165,2355 1445.35,2074.65 C18.2 1537,2022.65 U3.48 1577.72,1966.28 ; U11.4 1185,1835 1205.35,1814.65 C40.2@1205.35,1750 ; C40.2@1212.68,1742.68 1220,1750 1285.35,1750 1330,1705.35 1330,1650 1305,1625 1305,1560 1345.35,1519.65 1405,1519.65 1444.65,1519.65 1497.01,1572.01 U3.64 1577.72,1646.67 1577.72,1522.72 C19.2@1522.32,1467.32 ; 1901,1941.94 U3.32 ; 1902,1686.04 U3.19 2078.61,1686.04 C16.2 ; 2555,1720 2624.65,1720 C10.2 ; C32.2@3370,1505 C32.2 C32.2@3375.35,1509.65 ; C33.2 3515,1509.65 3522.28,1516.92 U7.5
  Top Layer w15: C10.2@2625,1701.61 U2.8
  Top Layer w20: 1577.72,1966.28 1602.06,1941.94 ; 1872.99,1715.04 1902,1686.04 ; 1872.99,1941.94 1901,1941.94 ; U3.32@1975.7,1945.88 C15.2@2125.5,1945.88 ; L1.1 2205,1470 C20.2 2215,1480 2300,1480 2325,1505 2415,1505 ; C15.2@2130.42,1940 C14.2 2307.4,1977.4 U6.5 2309.33,2045 C30.2 TP8.1@2415,1964.65 ; 2415,1754.65 C11.2 TP8.1@2415,1920 ; R22.2 2662.6,1502.6 2665,1505 ; 3295,1505 C32.2@3370,1505 ; C32.2@3375.35,1509.65 C33.2
  Top Layer w30: 1577.72,1646.67 1821.05,1890 1872.99,1890 ; 1602.06,1941.94 1872.99,1941.94 1872.99,1890 ; 1872.99,1715.04 1872.99,1890
  Top Layer w50: 2415,1754.65 2415,1695 ; TP8.1@2415,1920 TP8.1 TP8.1@2415,1964.65 ; 2555,1720 2530,1695 2415,1695 ; 2665,1505 3295,1505 ; 2775,1505 2570,1505 2530,1465 2455,1465 2415,1505 2415,1695
5V: C3.1 C23.1 C29.2 C34.2 C35.2 C37.2 C38.2 C39.2 R17.2 R23.2 TP5.1 U1.17 U4.5 U6.1 U8.5 U9.3 U9.5 U10.5 | length 4820.2
  Top Layer w10: R17.2 2184.96,3267.56 U4.5@2310,3267.56 ; R23.2 2308.5,3021.5 TP5.1@2310,3020 ; C39.2@3285,3207.6 C39.2
  Top Layer w20: U6.1 2307.4,2335 ; 2310,3065 C23.1 ; U4.5@2310,3270.24 U4.5@2310,3267.56 ; U4.5 U4.5@2310,3267.56 ; 2390,3147 2313,3147 C23.1 ; 2678.29,2198.29 C3.1 ; C3.1@2687.94,2261.5 2745,2318.56 2745,2478.04 2717.94,2505.1 ; 2912.94,3242.6 C37.2 2986.07,3403.13 U9.3 3027.41,3443.39 U9.5 C38.2@3102.21,3624.85 ; 3162.4,1970.37 C35.2 ; 3202.6,3207.6 C39.2@3285,3207.6 ; C34.2@3227.05,2106.23 C35.2 ; U8.5 3227.05,1880.01 C35.2 ; C39.2 3370.02,3209.65 U10.5 ; C23.1 U4.5@2310,3267.56
  Top Layer w30: 2678.29,2198.29 2670,2190 2670,2005 2704.63,1970.37 3162.4,1970.37 ; C34.2@3227.05,2106.23 C34.2
  Top Layer w50: 2310,2337.6 2310,2675 ; 2310,3065 TP5.1 2310,3020 2310,2675 ; 2390,3147 2428,3185 2912.94,3185 ; 2717.94,2505.1 2608.04,2615 2525,2615 2465,2675 2310,2675 ; 2912.94,3242.6 2912.94,3185 ; 3202.6,3207.6 2992.6,3207.6 2970,3185 2912.94,3185
5V_RESET: R17.1 TP7.1 U4.4 U6.3 | length 1789.9
  Top Layer w10: U6.3 2232.6,2197.6 2252.5,2217.5 2252.5,2960.1 2237.6,2975 2161.46,2975 2131.46,2945 1960,2945 1935,2970 1935,3092.4 R17.1 U4.4@2357.6,3317.4
12V: C1.1 C2.2 C26.2 C27.1 C28.2 J1.1 Q1.5 R24.1 TP4.1 U1.1 U4.1 U4.2 U5.7 | length 3145.9
  Top Layer w10: U5.7 2327.44,3782.8 2325.92,3793.74 C26.2@2325,3800.35 ; U4.2 2230.12,3404.88 2220,3415 2220,3440 2229.76,3449.76 U4.1 ; C26.2 C26.2@2360,3820
  Top Layer w18: U1.1@3095.15,2759.85 U1.1 3095,2920.45 3130,2955.46 C2.2 3287.94,2955.46 3335,2955.46 3355.46,2935 3545,2935 3615,3005 3837.5,3005 3892.5,3060 ; 4092.5,2224.62 4092.5,2365
  Top Layer w20: C26.2@2360,3820 2360,3952.5 2469.65,4062.15 ; C28.2 2469.65,3604.65 2469.65,3669.65 ; R24.1 3756.7,1851.7 TP4.1
  Top Layer w30: U4.1 2364.76,3449.76 2400,3485 2400,3535 C28.2@2469.65,3604.65 ; 2445,4080 2465,4060
  Top Layer w50: 2469.65,3669.65 2469.65,4062.15 ; TP4.1 4105,2200
12V_BUF: TP16.1 U3.17 U7.1 U7.4 | length 2233.8
  Top Layer w18: U3.17@1955.03,1643.02 1955.03,1632.91 2036.71,1551.23 2257.5,1551.23 v2(2275,1533.73) ; TP16.1 2420,1365 3610,1365 3719.57,1474.57 U7.1 3678.08,1516.92 3665,1530 3665,1611.23 3651.23,1625 3613.77,1625 3603.43,1614.66 U7.4
  Bottom Layer w18: v2(2275,1533.73) 2275,1510 2340,1445 TP16.1@2365,1445
BAT_FAULT: TP14.1 U3.39 U5.6 | length 1999.1
  Top Layer w10: U3.39 1754.88,3104.88 2260,3610 2260,3740 2242.8,3757.2 U5.6
CF: C9.2 R11.2 U1.22 | length 246
  Top Layer w10: U1.22 2995,2328.56 2972.94,2306.5 2974.26,2271.9 2974.65,2261.85 R11.2@3075.54,2261.85
CJ125_IA: P4.5 R4.1 R10.2 U1.4 | length 863.7
  Top Layer w10: U1.4 2945,2702.17 3015.67,2631.5 3267.94,2631.5 3302.94,2596.5 3398.22,2596.5 R10.2@3405.62,2579.09 ; R4.1@3405.62,2427.51 R10.2@3405.62,2579.09 ; P4.5 3479.09,2579.09 R10.2 R10.2@3405.62,2579.09
CJ125_IP: P4.3 R10.1 U1.3 | length 712.4
  Top Layer w10: U1.3@2995,2803.9 U1.3 2995,2694.76 3032.27,2657.5 3281.94,2657.5 3317.94,2621.5 3383.22,2621.5 R10.1 3486.72,2725 P4.3
CJ125_SPI_MISO: P1.5 U1.14 | length 528.6
  Top Layer w10: v1(2385.35,2530) 2415.35,2500 2550,2500 2595,2455 U1.14
  Bottom Layer w10: P1.5 2240,2505 2265,2530 v1(2385.35,2530)
CJ125_SPI_MOSI: P1.7 U1.15 | length 620.8
  Top Layer w10: v1(2385.35,2605) 2440.35,2550 2556.5,2550 2645,2461.5 U1.15
  Bottom Layer w10: P1.7@2152.5,2617.5 P1.7 v1(2385.35,2605)
CJ125_SPI_SCK: P1.3 U1.13 | length 424.4
  Top Layer w10: v1(2385.35,2455) 2435,2455 2492.2,2397.8 U1.13
  Bottom Layer w10: P1.3 2225,2405 2275,2455 v1(2385.35,2455)
CJ125_SPI_SEL: P1.1 U1.16 | length 666.1
  Top Layer w10: v1(2435,2390) 2505,2320 2685,2320 2695,2330 U1.16
  Bottom Layer w10: P1.1 2235,2305 2320,2390 v1(2435,2390)
CJ125_UA: U2.1 U2.2 U3.22 | length 1244.9
  Top Layer w10: U3.22 1996.2,1745.09 2268.78,1745.09 v2(2350,1663.87) ; v2(2480,1635) 2525,1590 2855,1590 2904.65,1639.65 U2.1 2961.61,1701.61 2970,1710 2970,1720 2962.8,1727.2 U2.2
  Bottom Layer w10: v2(2350,1663.87) 2451.13,1663.87 v2(2480,1635)
CJ125_UN: P4.1 R2.1 | length 109.8
  Top Layer w10: R2.1 3523.9,2823.9 P4.1
CJ125_UR: U2.6 U2.7 U3.23 | length 881.7
  Top Layer w10: U3.23 1996.17,1764.78 ; 1996.2,1764.75 2310.25,1764.75 2322.2,1752.8 v2(2350,1752.8) ; v2(2480,1754.65) 2495.35,1770 2662.8,1770 2680,1752.8 ; U2.7 2687.8,1727.2 2680,1735 2680,1752.8 ; U2.6@2735.35,1754.65 2733.5,1754.65 U2.6 2680,1752.8
  Bottom Layer w10: v2(2350,1752.8) 2478.15,1752.8 v2(2480,1754.65)
CJ125_VM: P4.7 R3.1 U1.18 | length 861.7
  Top Layer w10: U1.18 2795,2438.56 2922.94,2566.5 3137.94,2566.5 3191.73,2512.7 R3.1 3235.64,2500 v1(3337.94,2500)
  Bottom Layer w10: v1(3337.94,2500) 3500,2500 P4.7
CJ_RESET: C7.1 P1.9 U1.8 | length 1103.2
  Top Layer w10: P1.9 2165,2885 2215,2935 v2(2220,2935) ; v2(2400,2935) 2400,2990 2455,3045 2650,3045 2695,3000 2695,2926.5 2742.95,2878.54 C7.1 C7.1@2745,2873.54
  Top Layer w20: U1.8 C7.1@2745,2873.54
  Bottom Layer w10: v2(2220,2935) v2(2400,2935) v2@2395,2930
CM: C6.1 U1.11 | length 143.1
  Top Layer w10: C6.1@2556.47,2867.96 C6.1@2570,2881.5 ; U1.11 U1.11@2595,2791.5
  Top Layer w20: C6.1@2556.47,2867.96 2595,2829.43 U1.11@2595,2791.5
DAC_OUT2: R28.1 TP17.1 U3.21 | length 1189
  Top Layer w10: U3.21 2249.59,1725.41 2298.19,1676.81 2298.19,1616.81 2345,1570 v2(2350,1570) ; TP17.1 2510,1560 2915,1560 2955,1600 R28.1@3010,1600
  Bottom Layer w10: v2(2350,1570) 2375,1545 TP17.1
GND: C1.2 C2.1 C3.2 C4.2 C5.2 C7.2 C8.1 C9.1 C10.1 C11.1 C12.1 C13.1 C14.1 C15.1 C16.1 C17.1 C18.1 C19.1 C20.1 C21.1 C22.1 C23.2 C24.2 C26.1 C27.2 C28.1 C29.1 C30.1 C31.1 C32.1 C33.1 C34.1 C35.1 C37.1 C38.1 C39.1 C40.1 D1.1 J2.5 J2.6 J2.7 J2.8 J2.9 J3.7 J3.8 J3.9 J3.10 J3.11 J3.12 LED1.1 LED2.1 LED3.1 LED4.1 P2.1 P3.1 P5.3 P7.2 Q2.3 R6.2 R9.1 R14.1 R21.2 R25.1 R27.1 R31.1 TP9.1 TP10.1 TP11.1 TP12.1 TP13.1 U1.24 U2.4 U3.12 U3.18 U3.31 U3.47 U3.63 U4.6 U5.4 U6.2 U7.2 U8.2 U9.2 U10.2 U11.1 | length 7501.7
  Top Layer w10: J2.5@966.26,2666.96 1021.04,2666.96 1031,2657 1031,2632 1021.53,2622.53 J2.7 ; v1(1433.92,1666.12) 1496.78,1666.12 U3.63 ; v1(1545,2738.74) LED1.1 LED2.1 ; v1(1555,2155) 1555,2121.27 1597.4,2078.87 U3.47 ; v1(1750,1388.87) 1750,1483.87 1794.25,1528.12 U3.12 ; U3.18 2008.87,1666.35 v1@2029.28,1645.94 ; U3.31 2001.78,1922.26 v1(2065,1859.03) ; v1(1990,2993.66) LED4.1 ; v1(2550.35,1997.4) R9.1 ; C10.1 C10.1 ; v1(2985,1778.39) 3047.65,1778.39 R14.1 ; U9.2 3015.79,3480.79 3040,3505 3040,3549.65 v1(3009.65,3580)
  Top Layer w15: U2.4 v1(2985,1778.39)
  Top Layer w20: v1(1075,1745.09) 1075.09,1745 C40.1@1129.65,1745 ; v1(1075,1985) U11.1@1152,1985 ; v1(1134.65,1685) 1134.65,1740 C40.1@1129.65,1745 ; C40.1 C40.1@1129.65,1745 ; v1(1235,3691.02) D1.1 ; v1(1270,1380) C13.1 v1(1329.65,1310) ; v1(1300,3605) D1.1 ; v1(1345,1600.35) 1405,1600.35 1405,1637.2 v1(1433.92,1666.12) ; v1(1366.34,3691.02) D1.1 ; v1(1485,2220) C18.1 1485.35,2155 v1(1555,2155) ; v1(1550,3736.85) C24.2 ; v1(1605.35,1400) C19.1 v1(1670,1465) ; v1(1635,3615) C24.2 ; v1(1635,3860) C24.2 ; v1(1715,3736.85) C24.2 ; v1(1750,1388.87) 1810.81,1388.87 1813.94,1385.74 v1(1813.94,1330) ; v1(1760,3547.6) R21.2 ; v1(2025.35,3691.02) U5.4@2025.35,3728.35 ; v1(2045,1295) C21.1 v1(2110,1360) ; v1@2074.02,1858.87 C15.1 v1(2130,1801.88) ; v1(2075,2130) 2134.65,2130 C31.1 v1(2135,2186.59) ; v1(2125,3150) C23.2 v1(2190,3080) ; v1(2185,1595) 2185,1659.65 C16.1 v1(2250,1660) ; v1(2200,1820) C14.1 v1(2340,1820) ; v1(2210,1295) C20.1 v1(2280,1355) ; v1(2270,2105) U6.2 ; v1(2335,3610) C26.1 2340,3680 v1(2410,3680) ; v1(2385,2320) 2385,2260.35 C29.1 v1(2450,2260) ; C30.1 v1(2490,2165) ; C8.1 v1(2452.94,2901.5) ; v1(2535,1905) C11.1 2535,1834.33 2544.33,1825 v1(2610,1825) ; v1(2537.94,2261.5) C3.2 2597.94,2261.14 v1(2597.94,2201.5) ; v1(2550.35,3655) C28.1 v1(2610,3590) ; v1(2565,1639.6) v1(2565,1639.6) C10.1 ; v1(2595,3734.84) C27.2 ; C10.1 v1(2695,1639.6) ; v1(2680,3612.99) C27.2 ; v1(2680,3857.99) C27.2 ; C7.2@2747.85,2957.1 C7.2 v1(2750,3021.5) ; v1(2760,3734.84) C27.2 ; v1(2787.94,2191.5) 2852.58,2191.5 C12.1 v1(2852.94,2131.5) ; v1(2792.94,3260) C37.1 v1(2792.94,3400) ; v1(2830,3597.4) R31.1@2865,3597.4 ; R6.2 v1(2907.94,3010) ; LED3.1 v1(2986.07,1430) ; v1(2950,3642.99) C38.1 v1(3009.65,3580) ; v1(2971.73,2959.25) C5.2 ; v1(2980,2130) C9.1@2980,2181.67 ; C9.1@2995,2191.14 2996.5,2189.65 v1(3060,2189.65) ; U1.24 v1(3137.94,2397.8) ; v1(3172.94,2740) 3173.04,2740.1 C4.2 ; v1(3172.94,2811.5) C2.1 ; v1(3225,3290.35) C39.1 v1(3285,3350) ; v1(3264.8,1701.59) U8.2 ; v1(3307.4,2036.59) 3307.4,1970.72 C35.1 3308.97,1971.59 v1(3377.4,1971.59) ; v1(3320,3145) 3395,3145 3411,3129 U10.2 ; v1(3350,1695) 3350,1655 C32.1 3415.62,1670.62 v1(3415.62,1695) ; v1(3352.4,2186.59) C34.1 v1(3427.4,2111.59) ; v1(3352.94,2810) 3319.43,2810 C1.2 3317.94,2871.5 v1(3352.94,2871.5) ; Q2.3 3417.56,3680 v1(3470,3680) ; v1(3470,1655) 3470,1615.35 C33.1 3535,1630.35 v1(3535,1655) ; R27.1 v1(3522.4,2106.59) ; R25.1 v1(3642.6,1742.8) ; U7.2@3707.5,1554.32 U7.2 v1(3790,1554.32)
  Top Layer w30: C5.2 C5.2@3037.09,2959.25 ; C2.1 C2.1@3173.58,2874.1
  other v1: 2030,1646.67 2495,3280 2575,3280 2650,3280 2495,3360 2575,3360 2650,3360 2495,3440 2575,3440 2650,3440
HEATER-: P8.1 R12.1 R29.2 U10.3 | length 598.7
  Top Layer w10: U10.3 3484.93,3089.93 3530,3135 3585,3135 3595,3125 R29.2 3550,3085 R12.1@3463.7,2998.7
  Top Layer w30: R29.2 3620,3085 3710,3175 P8.1
NetC4_1: C4.1 C5.1 R2.2 R7.1 U1.2 | length 976.7
  Top Layer w10: C5.1 C5.1@3045,2863.19 ; U1.2 3045,2697.76 3059.27,2683.5 3263.5,2683.5 C4.1@3313.29,2733.29 ; C4.1@3313.29,2719.29 C4.1@3313.29,2733.29 ; R7.1 3375,2479.14 3375,2519.43 v2(3337.94,2556.5) ; v2(3337.94,2661.5) 3337.94,2715.46 C4.1@3316.7,2736.7 ; R2.2@3417.94,2752.03 3325.22,2752.03 C4.1 ; C4.1@3313.29,2733.29 C4.1 ; C4.1@3313.29,2733.29 C4.1@3316.7,2736.7 ; C4.1 C4.1@3316.7,2736.7
  Top Layer w20: U1.2 C5.1@3045,2863.19
  Bottom Layer w10: v2(3337.94,2556.5) v2(3337.94,2661.5)
NetC6_2: C6.2 R1.1 | length 78.3
  Top Layer w20: C6.2@2559.68,2956.3 R1.1@2637.94,2956.3
NetC25_1: C25.1 D2.2 Q1.2 Q1.4 TP6.1 U5.8 | length 813.3
  Top Layer w10: TP6.1 2110,3775 2143.39,3808.39 U5.8
  Top Layer w20: D2.2 1952.44,3870 2180,3870 ; 2080,3880 Q1.2 ; U5.8@2180,3815 2180,3870 ; C25.1 2265.35,3884.65 2230,3920 2193.14,3920 Q1.4 2180,3870
NetC25_2: C25.2 D2.1 Q1.1 Q1.3 TP3.1 | length 585.3
  Top Layer w10: C25.2 2290,3975.35 TP3.1
  Top Layer w20: D2.1 1957.44,3995 2250.35,3995 C25.2 ; Q1.1 2030,3985 ; Q1.3 2130,3985
NetC31_2: C31.2 U6.4 | length 94.9
  Top Layer w20: C31.2@2137.72,2046.93 U6.4
NetC36_1: C36.1 R26.1 R27.2 U8.4 | length 317
  Top Layer w10: U8.4 3408.79,1879.66 C36.1 3413.92,1874.53 R26.1 R27.2
NetC36_2: C36.2 P7.1 R26.2 U8.1 | length 990.1
  Top Layer w10: R26.2@3517.78,1795.1 R26.2 ; P7.1@3970,2235 P7.1@3970,2250
  Top Layer w20: U8.1 3227.4,1796.59 3247.4,1816.59 3325.92,1816.59 3347.4,1795.1 C36.2 R26.2@3517.78,1795.1 ; R26.2 3534.73,1799.73 P7.1@3970,2235
NetC41_1: C41.1 L3.2 U11.2 | length 395
  Top Layer w10: L3.2@865.94,1720.35 885,1739.41 885,1765 944.82,1824.82 C41.1 1115.18,1935 U11.2
NetC41_2: C41.2 L2.2 U11.3 | length 341.3
  Top Layer w10: L2.2 984.65,1723.75 C41.2 1014.01,1744.11 1080,1810.1 1080,1840 1125.39,1885.39 U11.3
NetJ1_2: J1.2 P4.4 | length 436.6
  Top Layer w10: P4.4 3625,2735 3725,2835 3890,2835 J1.2
NetJ1_3: J1.3 P4.8 | length 431.1
  Top Layer w10: P4.8 3745,2525 J1.3@3965,2745
NetJ1_4: J1.4 P8.2 | length 181.5
  Top Layer w50: J1.4 3810,3137 P8.2
NetJ1_5: J1.5 P4.2 | length 172.4
  Top Layer w10: P4.2 3720,2920 J1.5
NetJ1_6: J1.6 P4.6 | length 186.8
  Top Layer w10: P4.6 3628,2625 J1.6
NetLED1_2: LED1.2 R15.1 | length 116.3
  Top Layer w10: R15.1 LED1.2
NetLED2_2: LED2.2 R16.1 | length 116.3
  Top Layer w10: R16.1 LED2.2
NetLED3_2: LED3.2 R22.1 | length 106.3
  Top Layer w10: R22.1 LED3.2
NetLED4_2: LED4.2 R23.1 | length 115.3
  Top Layer w10: LED4.2 2087.76,3076.34 R23.1
NetP1_2: P1.2 U3.33 | length 368.9
  Top Layer w10: U3.33 1872.99,2112.99 2057.8,2297.8 P1.2@2075,2297.8
NetP1_4: P1.4 U3.34 | length 480
  Top Layer w10: U3.34 1853.31,2198.31 2052.8,2397.8 P1.4@2075,2397.8
NetP1_6: P1.6 U3.35 | length 585.2
  Top Layer w10: U3.35 1833.62,2273.62 2057.8,2497.8 P1.6@2075,2497.8
NetP1_8: P1.8 U3.36 | length 693.4
  Top Layer w10: U3.36 1813.94,2353.94 2057.8,2597.8 P1.8@2075,2597.8
NetP1_10: P1.10 U3.37 | length 794.5
  Top Layer w10: U3.37 1794.25,2434.25 P1.10
NetP2_2: P2.2 U5.5 | length 1547.7
  Top Layer w10: P2.2 1035,3165 1120,3165 1395,3440 2020,3440 2194.65,3614.65 U5.5
NetP2_3: P2.3 R18.1 | length 367.6
  Top Layer w10: P2.3 1075,3242.4 R18.1
NetQ2_1: Q2.1 R30.2 | length 452.8
  Top Layer w10: R30.2 3409.02,3585 3542.6,3585 3594.76,3637.17 Q2.1
NetQ2_4: Q2.4 R29.1 U10.4 | length 498.7
  Top Layer w10: U10.4 3449.83,3207.5 3477.5,3207.5 3530,3155 3585,3155 3595,3165 R29.1 ; Q2.4@3530,3463.7 Q2.4@3595,3398.7
  Top Layer w30: R29.1 Q2.4@3595,3398.7
NetR3_2: R3.2 U1.9 | length 634.5
  Top Layer w10: U1.9 2695,2700 2793.5,2601.5 3208.95,2601.5 R3.2
NetR4_2: R4.2 R5.1 R7.2 U1.20 | length 660.1
  Top Layer w10: U1.20@2895,2407.8 2895,2438.56 2962.94,2506.5 3097.94,2506.5 3179.98,2424.45 3179.98,2395.65 R5.1 R7.2 R4.2
NetR5_2: R5.2 U1.19 | length 496.1
  Top Layer w10: U1.19@2845,2407.8 2845,2441.5 2940,2536.5 3113.95,2536.5 R5.2
NetR6_1: R6.1 U1.5 | length 124.5
  Top Layer w20: U1.5 2895,2866.16 R6.1
NetR8_2: R8.2 R9.2 U2.5 | length 250.8
  Top Layer w10: R9.2 2610,1880 2630,1860 R8.2 2692.6,1790.4 2704.61,1778.39 U2.5
NetR12_2: R12.2 U1.7 | length 881.8
  Top Layer w10: U1.7 2795,2800 2805,2810 2805,2995 2880,3070 3112.94,3070 3147.94,3035 3352.6,3035 R12.2
NetR13_2: R13.2 R14.2 U2.3 | length 351.6
  Top Layer w10: U2.3 2857.2,1752.8 2845,1765 2845,1795 2865,1815 2934,1815 2945.34,1826.34 R13.2 3054.46,1860 R14.2
NetR15_2: R15.2 U3.41 | length 459.2
  Top Layer w10: R15.2@1632.5,2447.5 1715.51,2364.49 U3.41
NetR16_2: R16.2 U3.40 | length 456.9
  Top Layer w10: R16.2 1735.2,2429.8 U3.40
NetR19_2: R19.2 R20.1 U5.2 | length 240.3
  Top Layer w10: R20.1 1907.6,3720.2 R19.2 1910,3725 1967.8,3782.8 U5.2
NetR20_2: R20.2 R21.1 U5.3 | length 394.6
  Top Layer w10: R21.1 1817.6,3622.4 1860,3580 1937.4,3580 R20.2 1982.4,3667.6 1965,3685 1965,3742.2 1980,3757.2 U5.3
NetR24_2: R24.2 R25.2 U7.3 | length 185.2
  Top Layer w10: U7.3 R24.2
NetR28_2: R28.2 U8.3 | length 344.5
  Top Layer w10: R28.2@3092.4,1596.94 3247.76,1596.94 3302.2,1651.39 U8.3
NetTP18_1: TP18.1 U3.60 | length 120.4
  Top Layer w10: TP18.1 1397.24,1725.41 U3.60
NRST: C13.2 P3.2 U3.7 | length 1572.1
  Top Layer w10: P3.2 1195,2055 1265,1985 v2(1265,1800) ; v2(1280,1687.8) 1265,1672.8 1265,1530 1440,1355 1625,1355 1705,1435 1705,1500 1695.83,1509.17 U3.7
  Bottom Layer w10: v2(1265,1800) 1280,1785 v2(1280,1687.8) v2@1274.7,1687.8
PWM_CUR: U3.27 U10.1 | length 2655.8
  Top Layer w10: U3.27 1996.52,1843.52 v1(2025,1815) ; v2(2015,1993.87) 2015,2155 2095,2235 2200,2235 2225,2260 2225,2810 v2(2215,2820) ; v2(2375,2820) 2375,2815 2365,2825 2365,3000 2460,3095 U10.1@3373.6,3095
  Bottom Layer w10: v2(2015,1993.87) 2015,1825 v1(2025,1815) v1@2025,1806.17 ; v2(2215,2820) v2(2375,2820)
PWM_DRIVE: R30.1 U1.6 U9.4 | length 1033.7